# EAGLE board motor_driver_panel (EAGLE 6.6.0)
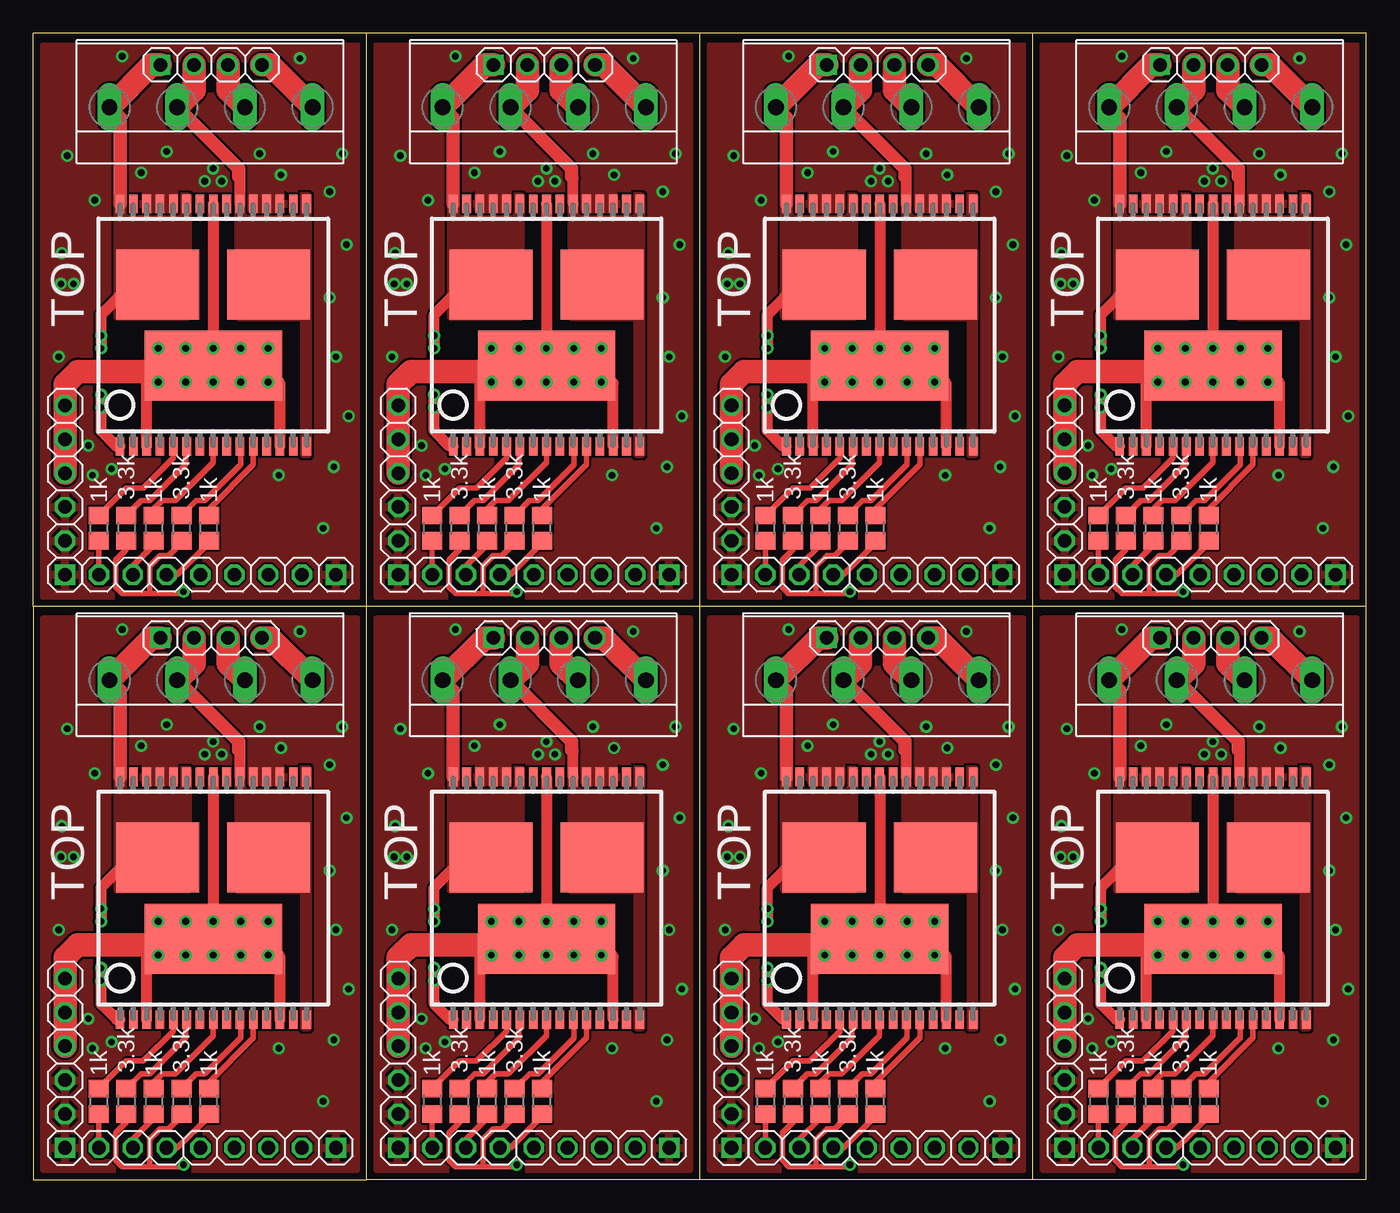
[diagram p0: board, top side]
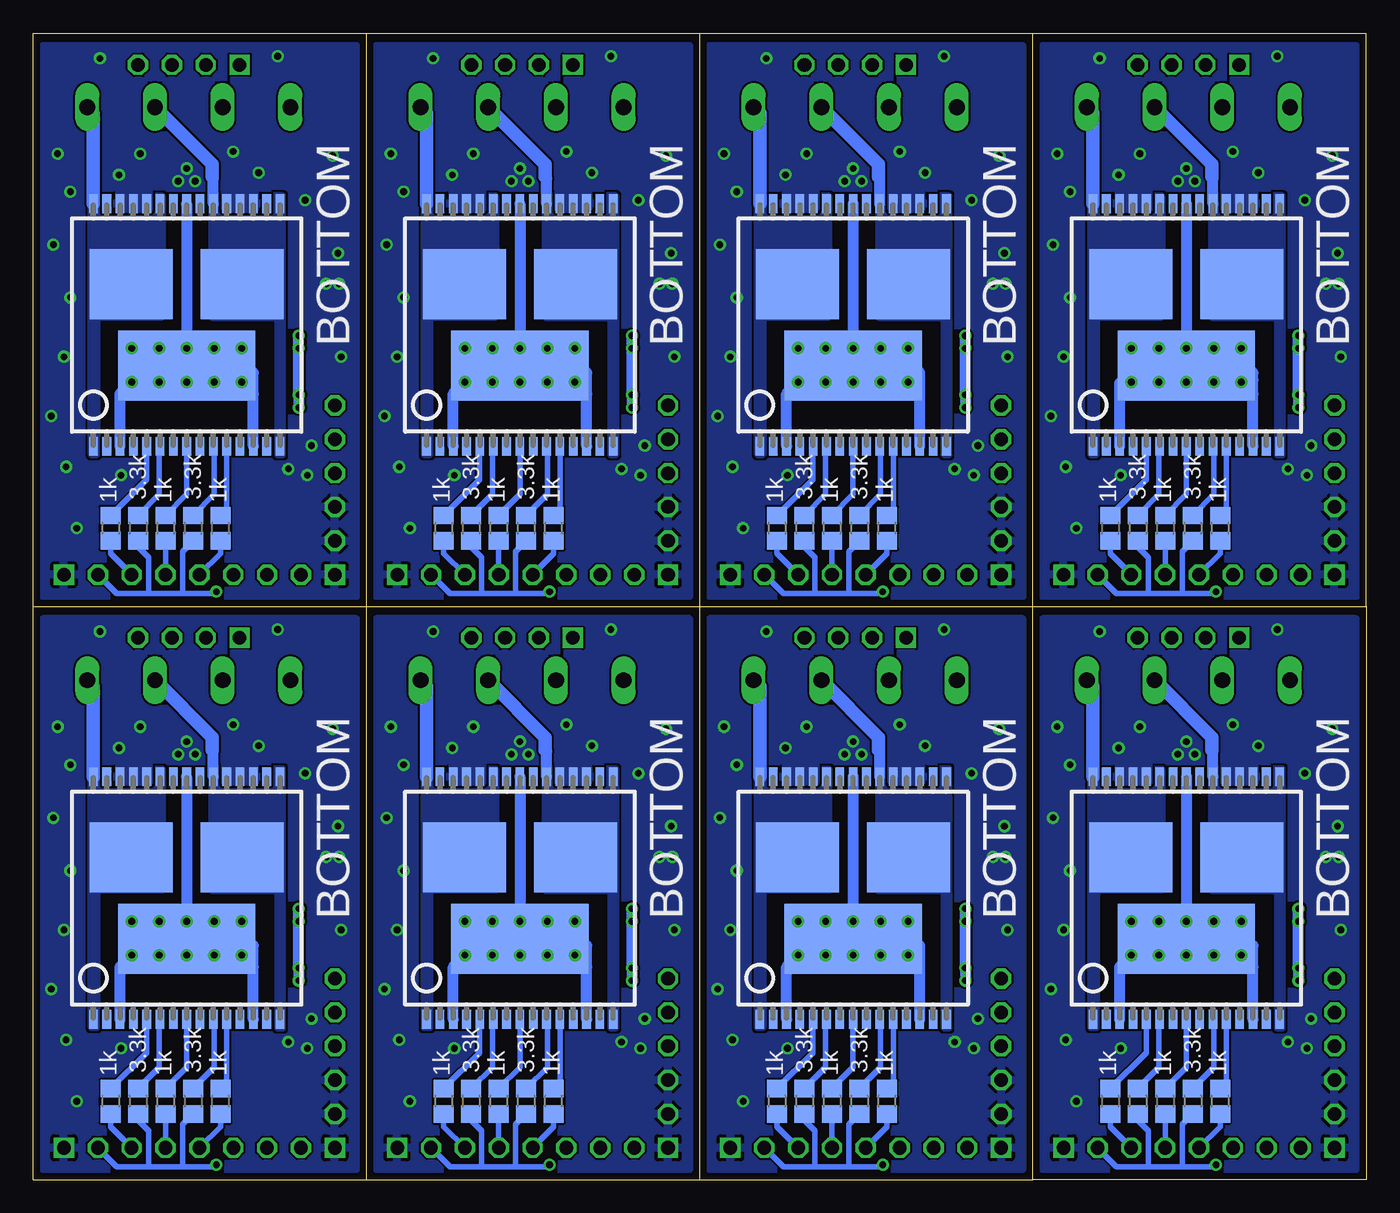
[diagram p1: board, bottom side, seen from below]

Size 100 x 86 mm. Coordinates in mm from the lower left corner, seen from the top.
Outline: 0,43 0,86 25,86
Outline: 75,0 100,0 100,43
Outline: 75,0 50,0
Outline: 50,0 25,0
Outline: 25,0 0,0 0,43
Outline: 25,0 25,43
Outline: 25,43 0,43
Outline: 50,0 50,43
Outline: 50,43 25,43
Outline: 75,0 75,43
Outline: 75,43 50,43
Outline: 100,43 75,43
Outline: 25,43 25,86
Outline: 50,43 50,86
Outline: 50,86 25,86
Outline: 75,43 75,86
Outline: 75,86 50,86
Outline: 100,43 100,86 75,86
Copper layers (1*16): Top 0.035mm / dielectric 1.5mm / Bottom 0.035mm
Design rules "default *": minimum track width 10mil, minimum drill 18mil, track to track 6mil, track to pad 6mil, pad to pad 6mil, via to via 6mil, smd to smd 0mil, copper to edge 20mil, drill to drill 8mil, minimum pad ring 10mil, minimum via ring 8mil, stop-mask expansion 4mil, vias tented up to drill 0mil, thermal gap 10mil
Net classes: 0 default: width 0.254 mm, drill 0.5 mm; 1 5v: width 0.254 mm, drill 0.5 mm; 2 power: width 0.406 mm, drill 0.5 mm, clearance 0.1 mm

## Footprints (pad centres in the part's own frame; a part is rotated, then mirrored left to right if it is on the bottom)
MP-SO-30 = smd 0.65 x 1.4: NC1 -6,9.1; NC2 -1,9.1; NC3 1,9.1; NC4 6,9.1; NC5 -6,-9.1; NC6 -4,-9.1; NC7 -1,-9.1; NC8 4,-9.1; NC9 6,-9.1; P1 -7,-9.1; P3 -5,-9.1; P5 -3,-9.1; P6 -2,-9.1; P8 0,-9.1; P9 1,-9.1; P10 2,-9.1; P11 3,-9.1; P13 5,-9.1; P15 7,-9.1; P16 7,9.1; P18 5,9.1; P19 4,9.1; P20 3,9.1; P21 2,9.1; P23 0,9.1; P25 -2,9.1; P26 -3,9.1; P27 -4,9.1; P28 -5,9.1; P30 -7,9.1 | smd 10.3 x 5.25: S1 0,-3.05 | smd 6.23 x 5.25: S2 -4.165,3.05; S3 4.165,3.05
1X08-S = drill 1.016 square: 1 -8.89,0 | drill 1.016 octagon: 2 -6.35,0; 3 -3.81,0; 4 -1.27,0; 5 1.27,0; 6 3.81,0; 7 6.35,0; 8 8.89,0
1X06-S = drill 1.016 square: 1 -6.35,0 | drill 1.016 octagon: 2 -3.81,0; 3 -1.27,0; 4 1.27,0; 5 3.81,0; 6 6.35,0
1X04-S = drill 1.016 square: 1 -3.81,0 | drill 1.016 octagon: 2 -1.27,0; 3 1.27,0; 4 3.81,0
R0805 = smd 1.3 x 1.5: 1 -0.95,0; 2 0.95,0
KLEMME_4-PIN = drill 1.194 long: 1 -2.54,0; 2 2.54,0; 3 7.62,0; 4 12.7,0

## Placement (x,y rotation side)
IC1  VNH2SP30-E  [MP-SO-30]  13.5,21.11 0 top
IC2  VNH2SP30-E  [MP-SO-30]  13.49,21.11 0 bottom
IC3  VNH2SP30-E  [MP-SO-30]  38.5,21.11 0 top
IC4  VNH2SP30-E  [MP-SO-30]  38.49,21.11 0 bottom
IC5  VNH2SP30-E  [MP-SO-30]  63.5,21.11 0 top
IC6  VNH2SP30-E  [MP-SO-30]  63.49,21.11 0 bottom
IC7  VNH2SP30-E  [MP-SO-30]  88.5,21.11 0 top
IC8  VNH2SP30-E  [MP-SO-30]  88.49,21.11 0 bottom
IC9  VNH2SP30-E  [MP-SO-30]  13.5,64.11 0 top
IC10  VNH2SP30-E  [MP-SO-30]  13.49,64.11 0 bottom
IC11  VNH2SP30-E  [MP-SO-30]  38.5,64.11 0 top
IC12  VNH2SP30-E  [MP-SO-30]  38.49,64.11 0 bottom
IC13  VNH2SP30-E  [MP-SO-30]  63.5,64.11 0 top
IC14  VNH2SP30-E  [MP-SO-30]  63.49,64.11 0 bottom
IC15  VNH2SP30-E  [MP-SO-30]  88.5,64.11 0 top
IC16  VNH2SP30-E  [MP-SO-30]  88.49,64.11 0 bottom
JP1  [1X08-S]  13.81,2.38 180 top
JP2  [1X06-S]  2.38,8.73 90 top
JP3  [1X04-S]  13.34,40.64 0 top
JP4  [1X08-S]  38.81,2.38 180 top
JP5  [1X06-S]  27.38,8.73 90 top
JP6  [1X04-S]  38.34,40.64 0 top
JP7  [1X08-S]  63.81,2.38 180 top
JP8  [1X06-S]  52.38,8.73 90 top
JP9  [1X04-S]  63.34,40.64 0 top
JP10  [1X08-S]  88.81,2.38 180 top
JP11  [1X06-S]  77.38,8.73 90 top
JP12  [1X04-S]  88.33,40.64 0 top
JP13  [1X08-S]  13.81,45.38 180 top
JP14  [1X06-S]  2.38,51.73 90 top
JP15  [1X04-S]  13.34,83.64 0 top
JP16  [1X08-S]  38.81,45.38 180 top
JP17  [1X06-S]  27.38,51.73 90 top
JP18  [1X04-S]  38.34,83.64 0 top
JP19  [1X08-S]  63.81,45.38 180 top
JP20  [1X06-S]  52.38,51.73 90 top
JP21  [1X04-S]  63.34,83.64 0 top
JP22  [1X08-S]  88.81,45.38 180 top
JP23  [1X06-S]  77.38,51.73 90 top
JP24  [1X04-S]  88.33,83.64 0 top
R1  3.3k  [R0805]  36.11,5.87 270 top
R2  3.3k  [R0805]  31.98,5.87 270 top
R3  3.3k  [R0805]  13.02,5.87 270 bottom
R4  3.3k  [R0805]  11.11,5.87 270 top
R5  3.3k  [R0805]  17.14,5.87 270 bottom
R6  1k  [R0805]  19.21,5.87 270 bottom
R7  1k  [R0805]  15.08,5.87 270 bottom
R8  1k  [R0805]  10.95,5.87 90 bottom
R9  1k  [R0805]  29.92,5.87 270 top
R10  3.3k  [R0805]  6.99,5.87 270 top
R11  1k  [R0805]  4.92,5.87 270 top
R12  1k  [R0805]  9.05,5.87 270 top
R13  1k  [R0805]  13.18,5.87 90 top
R14  1k  [R0805]  34.05,5.87 270 top
R15  1k  [R0805]  38.18,5.87 90 top
R16  3.3k  [R0805]  38.02,5.87 270 bottom
R17  3.3k  [R0805]  42.15,5.87 270 bottom
R18  1k  [R0805]  44.21,5.87 270 bottom
R19  1k  [R0805]  40.08,5.87 270 bottom
R20  1k  [R0805]  35.95,5.87 90 bottom
R21  3.3k  [R0805]  61.11,5.87 270 top
R22  3.3k  [R0805]  56.98,5.87 270 top
R23  1k  [R0805]  54.92,5.87 270 top
R24  1k  [R0805]  59.05,5.87 270 top
R25  1k  [R0805]  63.18,5.87 90 top
R26  3.3k  [R0805]  63.02,5.87 270 bottom
R27  3.3k  [R0805]  67.14,5.87 270 bottom
R28  1k  [R0805]  69.21,5.87 270 bottom
R29  1k  [R0805]  65.08,5.87 270 bottom
R30  1k  [R0805]  60.95,5.87 90 bottom
R31  3.3k  [R0805]  86.11,5.87 270 top
R32  3.3k  [R0805]  81.98,5.87 270 top
R33  1k  [R0805]  79.92,5.87 270 top
R34  1k  [R0805]  84.05,5.87 270 top
R35  1k  [R0805]  88.18,5.87 90 top
R36  3.3k  [R0805]  88.02,5.87 270 bottom
R37  3.3k  [R0805]  92.14,5.87 270 bottom
R38  1k  [R0805]  94.21,5.87 270 bottom
R39  1k  [R0805]  90.08,5.87 270 bottom
R40  1k  [R0805]  85.95,5.87 90 bottom
R41  3.3k  [R0805]  11.11,48.87 270 top
R42  3.3k  [R0805]  6.99,48.87 270 top
R43  1k  [R0805]  4.92,48.87 270 top
R44  1k  [R0805]  9.05,48.87 270 top
R45  1k  [R0805]  13.18,48.87 90 top
R46  3.3k  [R0805]  13.02,48.87 270 bottom
R47  3.3k  [R0805]  17.14,48.87 270 bottom
R48  1k  [R0805]  19.21,48.87 270 bottom
R49  1k  [R0805]  15.08,48.87 270 bottom
R50  1k  [R0805]  10.95,48.87 90 bottom
R51  3.3k  [R0805]  36.11,48.87 270 top
R52  3.3k  [R0805]  31.98,48.87 270 top
R53  1k  [R0805]  29.92,48.87 270 top
R54  1k  [R0805]  34.05,48.87 270 top
R55  1k  [R0805]  38.18,48.87 90 top
R56  3.3k  [R0805]  38.02,48.87 270 bottom
R57  3.3k  [R0805]  42.15,48.87 270 bottom
R58  1k  [R0805]  44.21,48.87 270 bottom
R59  1k  [R0805]  40.08,48.87 270 bottom
R60  1k  [R0805]  35.95,48.87 90 bottom
R61  3.3k  [R0805]  61.11,48.87 270 top
R62  3.3k  [R0805]  56.98,48.87 270 top
R63  1k  [R0805]  54.92,48.87 270 top
R64  1k  [R0805]  59.05,48.87 270 top
R65  1k  [R0805]  63.18,48.87 90 top
R66  3.3k  [R0805]  63.02,48.87 270 bottom
R67  3.3k  [R0805]  67.14,48.87 270 bottom
R68  1k  [R0805]  69.21,48.87 270 bottom
R69  1k  [R0805]  65.08,48.87 270 bottom
R70  1k  [R0805]  60.95,48.87 90 bottom
R71  3.3k  [R0805]  86.11,48.87 270 top
R72  3.3k  [R0805]  81.98,48.87 270 top
R73  1k  [R0805]  79.92,48.87 270 top
R74  1k  [R0805]  84.05,48.87 270 top
R75  1k  [R0805]  88.18,48.87 90 top
R76  3.3k  [R0805]  88.02,48.87 270 bottom
R77  3.3k  [R0805]  92.14,48.87 270 bottom
R78  1k  [R0805]  94.21,48.87 270 bottom
R79  1k  [R0805]  90.08,48.87 270 bottom
R80  1k  [R0805]  85.95,48.87 90 bottom
X1  [KLEMME_4-PIN]  8.26,37.47 0 top
X2  [KLEMME_4-PIN]  33.26,37.47 0 top
X3  [KLEMME_4-PIN]  58.26,37.47 0 top
X4  [KLEMME_4-PIN]  83.25,37.47 0 top
X5  [KLEMME_4-PIN]  8.26,80.47 0 top
X6  [KLEMME_4-PIN]  33.26,80.47 0 top
X7  [KLEMME_4-PIN]  58.26,80.47 0 top
X8  [KLEMME_4-PIN]  83.25,80.47 0 top

## Library data of the parts
IC1-IC16 = motor-driver
JP1-JP24 = pinhead-2
R1-R80 = rcl
X1-X8 = Schraubklemme

## Nets
+5V [5v]: JP1.2 R3.2 R4.2 R5.2 R10.2
+5V1 [5v]: JP4.2 R1.2 R2.2 R16.2 R17.2
+5V2 [5v]: JP7.2 R21.2 R22.2 R26.2 R27.2
+5V3 [5v]: JP10.2 R31.2 R32.2 R36.2 R37.2
+5V4 [5v]: JP13.2 R41.2 R42.2 R46.2 R47.2
+5V5 [5v]: JP16.2 R51.2 R52.2 R56.2 R57.2
+5V6 [5v]: JP19.2 R61.2 R62.2 R66.2 R67.2
+5V7 [5v]: JP22.2 R71.2 R72.2 R76.2 R77.2
+12V: IC1.P3 IC1.P13 IC1.P23 IC1.S1 IC2.P3 IC2.P13 IC2.P23 IC2.S1 JP2.4 JP2.5 JP2.6
+12V1: IC3.P3 IC3.P13 IC3.P23 IC3.S1 IC4.P3 IC4.P13 IC4.P23 IC4.S1 JP5.4 JP5.5 JP5.6
+12V2: IC5.P3 IC5.P13 IC5.P23 IC5.S1 IC6.P3 IC6.P13 IC6.P23 IC6.S1 JP8.4 JP8.5 JP8.6
+12V3: IC7.P3 IC7.P13 IC7.P23 IC7.S1 IC8.P3 IC8.P13 IC8.P23 IC8.S1 JP11.4 JP11.5 JP11.6
+12V4: IC9.P3 IC9.P13 IC9.P23 IC9.S1 IC10.P3 IC10.P13 IC10.P23 IC10.S1 JP14.4 JP14.5 JP14.6
+12V5: IC11.P3 IC11.P13 IC11.P23 IC11.S1 IC12.P3 IC12.P13 IC12.P23 IC12.S1 JP17.4 JP17.5 JP17.6
+12V6: IC13.P3 IC13.P13 IC13.P23 IC13.S1 IC14.P3 IC14.P13 IC14.P23 IC14.S1 JP20.4 JP20.5 JP20.6
+12V7: IC15.P3 IC15.P13 IC15.P23 IC15.S1 IC16.P3 IC16.P13 IC16.P23 IC16.S1 JP23.4 JP23.5 JP23.6
GND [5v]: IC1.P18 IC1.P19 IC1.P20 IC1.P26 IC1.P27 IC1.P28 IC2.P18 IC2.P19 IC2.P20 IC2.P26 IC2.P27 IC2.P28 JP1.1 JP2.1 JP2.2 JP2.3
GND1 [5v]: IC3.P18 IC3.P19 IC3.P20 IC3.P26 IC3.P27 IC3.P28 IC4.P18 IC4.P19 IC4.P20 IC4.P26 IC4.P27 IC4.P28 JP4.1 JP5.1 JP5.2 JP5.3
GND2 [5v]: IC5.P18 IC5.P19 IC5.P20 IC5.P26 IC5.P27 IC5.P28 IC6.P18 IC6.P19 IC6.P20 IC6.P26 IC6.P27 IC6.P28 JP7.1 JP8.1 JP8.2 JP8.3
GND3 [5v]: IC7.P18 IC7.P19 IC7.P20 IC7.P26 IC7.P27 IC7.P28 IC8.P18 IC8.P19 IC8.P20 IC8.P26 IC8.P27 IC8.P28 JP10.1 JP11.1 JP11.2 JP11.3
GND4 [5v]: IC9.P18 IC9.P19 IC9.P20 IC9.P26 IC9.P27 IC9.P28 IC10.P18 IC10.P19 IC10.P20 IC10.P26 IC10.P27 IC10.P28 JP13.1 JP14.1 JP14.2 JP14.3
GND5 [5v]: IC11.P18 IC11.P19 IC11.P20 IC11.P26 IC11.P27 IC11.P28 IC12.P18 IC12.P19 IC12.P20 IC12.P26 IC12.P27 IC12.P28 JP16.1 JP17.1 JP17.2 JP17.3
GND6 [5v]: IC13.P18 IC13.P19 IC13.P20 IC13.P26 IC13.P27 IC13.P28 IC14.P18 IC14.P19 IC14.P20 IC14.P26 IC14.P27 IC14.P28 JP19.1 JP20.1 JP20.2 JP20.3
GND7 [5v]: IC15.P18 IC15.P19 IC15.P20 IC15.P26 IC15.P27 IC15.P28 IC16.P18 IC16.P19 IC16.P20 IC16.P26 IC16.P27 IC16.P28 JP22.1 JP23.1 JP23.2 JP23.3
M1_FW: JP1.8 R11.2
M1_FW1: JP4.8 R9.2
M1_FW2: JP7.8 R23.2
M1_FW3: JP10.8 R33.2
M1_FW4: JP13.8 R43.2
M1_FW5: JP16.8 R53.2
M1_FW6: JP19.8 R63.2
M1_FW7: JP22.8 R73.2
M1_PWM: JP1.7 R12.2
M1_PWM1: JP4.7 R14.2
M1_PWM2: JP7.7 R24.2
M1_PWM3: JP10.7 R34.2
M1_PWM4: JP13.7 R44.2
M1_PWM5: JP16.7 R54.2
M1_PWM6: JP19.7 R64.2
M1_PWM7: JP22.7 R74.2
M1_RW: JP1.6 R13.1
M1_RW1: JP4.6 R15.1
M1_RW2: JP7.6 R25.1
M1_RW3: JP10.6 R35.1
M1_RW4: JP13.6 R45.1
M1_RW5: JP16.6 R55.1
M1_RW6: JP19.6 R65.1
M1_RW7: JP22.6 R75.1
M2_FW: JP1.3 R6.2
M2_FW1: JP4.3 R18.2
M2_FW2: JP7.3 R28.2
M2_FW3: JP10.3 R38.2
M2_FW4: JP13.3 R48.2
M2_FW5: JP16.3 R58.2
M2_FW6: JP19.3 R68.2
M2_FW7: JP22.3 R78.2
M2_PWM: JP1.4 R7.2
M2_PWM1: JP4.4 R19.2
M2_PWM2: JP7.4 R29.2
M2_PWM3: JP10.4 R39.2
M2_PWM4: JP13.4 R49.2
M2_PWM5: JP16.4 R59.2
M2_PWM6: JP19.4 R69.2
M2_PWM7: JP22.4 R79.2
M2_RW: JP1.5 R8.1
M2_RW1: JP4.5 R20.1
M2_RW2: JP7.5 R30.1
M2_RW3: JP10.5 R40.1
M2_RW4: JP13.5 R50.1
M2_RW5: JP16.5 R60.1
M2_RW6: JP19.5 R70.1
M2_RW7: JP22.5 R80.1
N$1: IC2.P5 R6.1
N$2: IC2.P6 R5.1
N$3: IC1.P5 R11.1
N$4: IC2.P10 R3.1
N$5: IC3.P5 R9.1
N$6: IC2.P8 R7.1
N$7: IC1.P6 R10.1
N$8: IC1.P10 R4.1
N$9: IC3.P6 R2.1
N$10: IC1.P8 R12.1
N$11: IC1.P11 R13.2
N$12 [power]: IC1.P1 IC1.P25 IC1.P30 IC1.S2 JP3.1 X1.1
N$13 [power]: IC1.P15 IC1.P16 IC1.P21 IC1.S3 JP3.2 X1.2
N$14: IC2.P11 R8.2
N$15: IC3.P10 R1.1
N$16: IC3.P8 R14.1
N$17: IC2.P15 IC2.P16 IC2.P21 IC2.S3 JP3.3 X1.3
N$18: IC3.P11 R15.2
N$19: IC2.P1 IC2.P25 IC2.P30 IC2.S2 JP3.4 X1.4
N$20 [power]: IC3.P1 IC3.P25 IC3.P30 IC3.S2 JP6.1 X2.1
N$21 [power]: IC3.P15 IC3.P16 IC3.P21 IC3.S3 JP6.2 X2.2
N$22: IC4.P5 R18.1
N$23: IC4.P6 R17.1
N$24: IC4.P10 R16.1
N$25: IC4.P8 R19.1
N$26: IC4.P11 R20.2
N$27: IC4.P15 IC4.P16 IC4.P21 IC4.S3 JP6.3 X2.3
N$28: IC4.P1 IC4.P25 IC4.P30 IC4.S2 JP6.4 X2.4
N$29: IC5.P5 R23.1
N$30: IC5.P6 R22.1
N$31: IC5.P10 R21.1
N$32: IC5.P8 R24.1
N$33: IC5.P11 R25.2
N$34 [power]: IC5.P1 IC5.P25 IC5.P30 IC5.S2 JP9.1 X3.1
N$35 [power]: IC5.P15 IC5.P16 IC5.P21 IC5.S3 JP9.2 X3.2
N$36: IC6.P5 R28.1
N$37: IC6.P6 R27.1
N$38: IC6.P10 R26.1
N$39: IC6.P8 R29.1
N$40: IC6.P11 R30.2
N$41: IC6.P15 IC6.P16 IC6.P21 IC6.S3 JP9.3 X3.3
N$42: IC6.P1 IC6.P25 IC6.P30 IC6.S2 JP9.4 X3.4
N$43: IC7.P5 R33.1
N$44: IC7.P6 R32.1
N$45: IC7.P10 R31.1
N$46: IC7.P8 R34.1
N$47: IC7.P11 R35.2
N$48 [power]: IC7.P1 IC7.P25 IC7.P30 IC7.S2 JP12.1 X4.1
N$49 [power]: IC7.P15 IC7.P16 IC7.P21 IC7.S3 JP12.2 X4.2
N$50: IC8.P5 R38.1
N$51: IC8.P6 R37.1
N$52: IC8.P10 R36.1
N$53: IC8.P8 R39.1
N$54: IC8.P11 R40.2
N$55: IC8.P15 IC8.P16 IC8.P21 IC8.S3 JP12.3 X4.3
N$56: IC8.P1 IC8.P25 IC8.P30 IC8.S2 JP12.4 X4.4
N$57: IC9.P5 R43.1
N$58: IC9.P6 R42.1
N$59: IC9.P10 R41.1
N$60: IC9.P8 R44.1
N$61: IC9.P11 R45.2
N$62 [power]: IC9.P1 IC9.P25 IC9.P30 IC9.S2 JP15.1 X5.1
N$63 [power]: IC9.P15 IC9.P16 IC9.P21 IC9.S3 JP15.2 X5.2
N$64: IC10.P5 R48.1
N$65: IC10.P6 R47.1
N$66: IC10.P10 R46.1
N$67: IC10.P8 R49.1
N$68: IC10.P11 R50.2
N$69: IC10.P15 IC10.P16 IC10.P21 IC10.S3 JP15.3 X5.3
N$70: IC10.P1 IC10.P25 IC10.P30 IC10.S2 JP15.4 X5.4
N$71: IC11.P5 R53.1
N$72: IC11.P6 R52.1
N$73: IC11.P10 R51.1
N$74: IC11.P8 R54.1
N$75: IC11.P11 R55.2
N$76 [power]: IC11.P1 IC11.P25 IC11.P30 IC11.S2 JP18.1 X6.1
N$77 [power]: IC11.P15 IC11.P16 IC11.P21 IC11.S3 JP18.2 X6.2
N$78: IC12.P5 R58.1
N$79: IC12.P6 R57.1
N$80: IC12.P10 R56.1
N$81: IC12.P8 R59.1
N$82: IC12.P11 R60.2
N$83: IC12.P15 IC12.P16 IC12.P21 IC12.S3 JP18.3 X6.3
N$84: IC12.P1 IC12.P25 IC12.P30 IC12.S2 JP18.4 X6.4
N$85: IC13.P5 R63.1
N$86: IC13.P6 R62.1
N$87: IC13.P10 R61.1
N$88: IC13.P8 R64.1
N$89: IC13.P11 R65.2
N$90 [power]: IC13.P1 IC13.P25 IC13.P30 IC13.S2 JP21.1 X7.1
N$91 [power]: IC13.P15 IC13.P16 IC13.P21 IC13.S3 JP21.2 X7.2
N$92: IC14.P5 R68.1
N$93: IC14.P6 R67.1
N$94: IC14.P10 R66.1
N$95: IC14.P8 R69.1
N$96: IC14.P11 R70.2
N$97: IC14.P15 IC14.P16 IC14.P21 IC14.S3 JP21.3 X7.3
N$98: IC14.P1 IC14.P25 IC14.P30 IC14.S2 JP21.4 X7.4
N$99: IC15.P5 R73.1
N$100: IC15.P6 R72.1
N$101: IC15.P10 R71.1
N$102: IC15.P8 R74.1
N$103: IC15.P11 R75.2
N$104 [power]: IC15.P1 IC15.P25 IC15.P30 IC15.S2 JP24.1 X8.1
N$105 [power]: IC15.P15 IC15.P16 IC15.P21 IC15.S3 JP24.2 X8.2
N$106: IC16.P5 R78.1
N$107: IC16.P6 R77.1
N$108: IC16.P10 R76.1
N$109: IC16.P8 R79.1
N$110: IC16.P11 R80.2
N$111: IC16.P15 IC16.P16 IC16.P21 IC16.S3 JP24.3 X8.3
N$112: IC16.P1 IC16.P25 IC16.P30 IC16.S2 JP24.4 X8.4

## Tracks (layer width: path | path; a pad name or v marks a point on that pad's centre or on a via)
+5V  (via drill 0.5)
  Top 0.406: R10.2 6.99,4.29 6.19,3.49 6.19,1.43 6.67,0.95 8.73,0.95 | 8.73,0.95 11.11,0.95 v11.27,1.11 | R4.2 10.8,4.92 10.8,4.61 10.79,4.6 10.79,4.45 10.16,3.81 9.53,3.81 8.73,3.02 8.73,0.95
  Bottom 0.406: JP1.2 18.73,0.95 16.35,0.95 | 16.35,0.95 13.81,0.95 | 13.81,0.95 13.81,4.13 R3.2 | R5.2 17.14,4.45 16.35,3.65 16.35,0.95 | v11.27,1.11 11.43,0.95 13.81,0.95
+5V1  (via drill 0.5)
  Top 0.406: R2.2 31.98,4.29 31.19,3.49 31.19,1.43 31.67,0.95 33.73,0.95 | 33.73,0.95 36.11,0.95 v36.27,1.11 | R1.2 35.8,4.92 35.8,4.61 35.8,4.6 35.8,4.45 35.16,3.81 34.52,3.81 33.73,3.02 33.73,0.95
  Bottom 0.406: JP4.2 43.73,0.95 41.35,0.95 | 41.35,0.95 38.81,0.95 | 38.81,0.95 38.81,4.13 R16.2 | R17.2 42.15,4.45 41.35,3.65 41.35,0.95 | v36.27,1.11 36.43,0.95 38.81,0.95
+5V2  (via drill 0.5)
  Top 0.406: R22.2 56.98,4.29 56.19,3.49 56.19,1.43 56.67,0.95 58.73,0.95 | 58.73,0.95 61.11,0.95 v61.27,1.11 | R21.2 60.8,4.92 60.8,4.61 60.8,4.6 60.8,4.45 60.16,3.81 59.52,3.81 58.73,3.02 58.73,0.95
  Bottom 0.406: JP7.2 68.73,0.95 66.35,0.95 | 66.35,0.95 63.81,0.95 | 63.81,0.95 63.81,4.13 R26.2 | R27.2 67.14,4.45 66.35,3.65 66.35,0.95 | v61.27,1.11 61.43,0.95 63.81,0.95
+5V3  (via drill 0.5)
  Top 0.406: R32.2 81.98,4.29 81.19,3.49 81.19,1.43 81.67,0.95 83.73,0.95 | 83.73,0.95 86.11,0.95 v86.27,1.11 | R31.2 85.8,4.92 85.8,4.61 85.8,4.6 85.8,4.45 85.16,3.81 84.53,3.81 83.73,3.02 83.73,0.95
  Bottom 0.406: JP10.2 93.73,0.95 91.35,0.95 | 91.35,0.95 88.81,0.95 | 88.81,0.95 88.81,4.13 R36.2 | R37.2 92.14,4.45 91.35,3.65 91.35,0.95 | v86.27,1.11 86.43,0.95 88.81,0.95
+5V4  (via drill 0.5)
  Top 0.406: R42.2 6.99,47.29 6.19,46.49 6.19,44.43 6.67,43.95 8.73,43.95 | 8.73,43.95 11.11,43.95 v11.27,44.11 | R41.2 10.8,47.92 10.8,47.61 10.79,47.6 10.79,47.45 10.16,46.81 9.53,46.81 8.73,46.02 8.73,43.95
  Bottom 0.406: JP13.2 18.73,43.95 16.35,43.95 | 16.35,43.95 13.81,43.95 | 13.81,43.95 13.81,47.13 R46.2 | R47.2 17.14,47.45 16.35,46.65 16.35,43.95 | v11.27,44.11 11.43,43.95 13.81,43.95
+5V5  (via drill 0.5)
  Top 0.406: R52.2 31.98,47.29 31.19,46.49 31.19,44.43 31.67,43.95 33.73,43.95 | 33.73,43.95 36.11,43.95 v36.27,44.11 | R51.2 35.8,47.92 35.8,47.61 35.8,47.6 35.8,47.45 35.16,46.81 34.52,46.81 33.73,46.02 33.73,43.95
  Bottom 0.406: JP16.2 43.73,43.95 41.35,43.95 | 41.35,43.95 38.81,43.95 | 38.81,43.95 38.81,47.13 R56.2 | R57.2 42.15,47.45 41.35,46.65 41.35,43.95 | v36.27,44.11 36.43,43.95 38.81,43.95
+5V6  (via drill 0.5)
  Top 0.406: R62.2 56.98,47.29 56.19,46.49 56.19,44.43 56.67,43.95 58.73,43.95 | 58.73,43.95 61.11,43.95 v61.27,44.11 | R61.2 60.8,47.92 60.8,47.61 60.8,47.6 60.8,47.45 60.16,46.81 59.52,46.81 58.73,46.02 58.73,43.95
  Bottom 0.406: JP19.2 68.73,43.95 66.35,43.95 | 66.35,43.95 63.81,43.95 | 63.81,43.95 63.81,47.13 R66.2 | R67.2 67.14,47.45 66.35,46.65 66.35,43.95 | v61.27,44.11 61.43,43.95 63.81,43.95
+5V7  (via drill 0.5)
  Top 0.406: R72.2 81.98,47.29 81.19,46.49 81.19,44.43 81.67,43.95 83.73,43.95 | 83.73,43.95 86.11,43.95 v86.27,44.11 | R71.2 85.8,47.92 85.8,47.61 85.8,47.6 85.8,47.45 85.16,46.81 84.53,46.81 83.73,46.02 83.73,43.95
  Bottom 0.406: JP22.2 93.73,43.95 91.35,43.95 | 91.35,43.95 88.81,43.95 | 88.81,43.95 88.81,47.13 R76.2 | R77.2 92.14,47.45 91.35,46.65 91.35,43.95 | v86.27,44.11 86.43,43.95 88.81,43.95
+12V  (via drill 0.5)
  Top 0.406: IC1.S1 12.19,19.37 v11.43,19.37 | IC2.S1 IC1.S1 | IC1.S1 14.73,16.83 v15.56,16.83 15.4,17.3 15.88,17.78 16.67,18.57 v17.62,19.37 | 12.86,19.05 12.38,18.57 | v9.37,19.37 9.84,18.57 10.08,18.34 10.32,18.1 9.84,17.62 v9.37,16.83 | 13.5,19.21 13.49,19.21 v13.49,19.37 v13.5,19.36 13.5,19.05 | 12.86,19.05 12.38,19.05 | 12.38,19.05 11.43,18.1 | 12.38,19.05 12.06,19.05 v11.43,19.37 | IC1.S1 13.5,19.04 13.49,19.05 | 13.49,19.05 12.86,19.05 | v11.43,19.37 13.18,19.37 13.49,19.05
  Top 0.813: IC1.P3 8.5,18.01 8.57,18.1 10.32,18.1 11.43,18.1 11.59,18.1 | 11.59,18.1 13.46,18.1 IC1.S1 | IC1.P23 13.5,19.21 | 13.5,19.05 IC1.S1 | IC1.P13 18.5,16.74 17.54,17.7 | 17.54,17.7 16.67,18.57 | v11.43,16.83 11.59,18.1 | v13.49,16.83 IC2.S1 IC1.S1 | v15.56,19.37 15.56,18.1 15.88,17.78 | v17.62,16.83 17.46,17.62 17.54,17.7
  Top 1.778: JP2.4 JP2.5 | JP2.5 JP2.6 | JP2.5 2.38,16.67 3.33,17.62 9.37,17.62 10.08,18.34
  Bottom 0.406: IC2.S1 v13.49,19.37
  Bottom 0.813: IC2.P23 v13.49,19.37 13.49,19.05 | 10,19.05 8.49,17.54 IC2.P13 8.49,15.96 v9.37,16.83 | IC2.P3 18.49,15.96 v17.62,16.83
+12V1  (via drill 0.5)
  Top 0.406: IC3.S1 37.19,19.37 v36.43,19.37 | IC4.S1 IC3.S1 | IC3.S1 39.73,16.83 v40.56,16.83 40.4,17.3 40.88,17.78 41.67,18.57 v42.62,19.37 | 37.86,19.05 37.38,18.57 | v34.37,19.37 34.84,18.57 35.08,18.34 35.32,18.1 34.84,17.62 v34.37,16.83 | 38.5,19.21 38.49,19.21 v38.49,19.37 v38.5,19.36 38.5,19.05 | 37.86,19.05 37.38,19.05 | 37.38,19.05 36.43,18.1 | 37.38,19.05 37.06,19.05 v36.43,19.37 | IC3.S1 38.5,19.04 38.49,19.05 | 38.49,19.05 37.86,19.05 | v36.43,19.37 38.18,19.37 38.49,19.05
  Top 0.813: IC3.P3 33.5,18.01 33.57,18.1 35.32,18.1 36.43,18.1 36.59,18.1 | 36.59,18.1 38.46,18.1 IC3.S1 | IC3.P23 38.5,19.21 | 38.5,19.05 IC3.S1 | IC3.P13 43.5,16.74 42.54,17.7 | 42.54,17.7 41.67,18.57 | v36.43,16.83 36.59,18.1 | v38.49,16.83 IC4.S1 IC3.S1 | v40.56,19.37 40.56,18.1 40.88,17.78 | v42.62,16.83 42.46,17.62 42.54,17.7
  Top 1.778: JP5.4 JP5.5 | JP5.5 JP5.6 | JP5.5 27.38,16.67 28.33,17.62 34.37,17.62 35.08,18.34
  Bottom 0.406: IC4.S1 v38.49,19.37
  Bottom 0.813: IC4.P23 v38.49,19.37 38.49,19.05 | 35,19.05 33.49,17.54 IC4.P13 33.49,15.96 v34.37,16.83 | IC4.P3 43.49,15.96 v42.62,16.83
+12V2  (via drill 0.5)
  Top 0.406: IC5.S1 62.19,19.37 v61.43,19.37 | IC6.S1 IC5.S1 | IC5.S1 64.73,16.83 v65.56,16.83 65.4,17.3 65.88,17.78 66.67,18.57 v67.62,19.37 | 62.86,19.05 62.38,18.57 | v59.37,19.37 59.84,18.57 60.08,18.34 60.32,18.1 59.84,17.62 v59.37,16.83 | 63.5,19.21 63.49,19.21 v63.49,19.37 v63.5,19.36 63.5,19.05 | 62.86,19.05 62.38,19.05 | 62.38,19.05 61.43,18.1 | 62.38,19.05 62.06,19.05 v61.43,19.37 | IC5.S1 63.5,19.04 63.49,19.05 | 63.49,19.05 62.86,19.05 | v61.43,19.37 63.18,19.37 63.49,19.05
  Top 0.813: IC5.P3 58.5,18.01 58.57,18.1 60.32,18.1 61.43,18.1 61.59,18.1 | 61.59,18.1 63.46,18.1 IC5.S1 | IC5.P23 63.5,19.21 | 63.5,19.05 IC5.S1 | IC5.P13 68.5,16.74 67.54,17.7 | 67.54,17.7 66.67,18.57 | v61.43,16.83 61.59,18.1 | v63.49,16.83 IC6.S1 IC5.S1 | v65.56,19.37 65.56,18.1 65.88,17.78 | v67.62,16.83 67.46,17.62 67.54,17.7
  Top 1.778: JP8.4 JP8.5 | JP8.5 JP8.6 | JP8.5 52.38,16.67 53.33,17.62 59.37,17.62 60.08,18.34
  Bottom 0.406: IC6.S1 v63.49,19.37
  Bottom 0.813: IC6.P23 v63.49,19.37 63.49,19.05 | 60,19.05 58.49,17.54 IC6.P13 58.49,15.96 v59.37,16.83 | IC6.P3 68.49,15.96 v67.62,16.83
+12V3  (via drill 0.5)
  Top 0.406: IC7.S1 87.19,19.37 v86.43,19.37 | IC8.S1 IC7.S1 | IC7.S1 89.73,16.83 v90.56,16.83 90.4,17.3 90.88,17.78 91.67,18.57 v92.62,19.37 | 87.86,19.05 87.38,18.57 | v84.37,19.37 84.84,18.57 85.08,18.34 85.32,18.1 84.84,17.62 v84.37,16.83 | 88.5,19.21 88.49,19.21 v88.49,19.37 v88.5,19.36 88.5,19.05 | 87.86,19.05 87.38,19.05 | 87.38,19.05 86.43,18.1 | 87.38,19.05 87.06,19.05 v86.43,19.37 | IC7.S1 88.5,19.04 88.49,19.05 | 88.49,19.05 87.86,19.05 | v86.43,19.37 88.18,19.37 88.49,19.05
  Top 0.813: IC7.P3 83.5,18.01 83.57,18.1 85.32,18.1 86.43,18.1 86.59,18.1 | 86.59,18.1 88.46,18.1 IC7.S1 | IC7.P23 88.5,19.21 | 88.5,19.05 IC7.S1 | IC7.P13 93.5,16.74 92.54,17.7 | 92.54,17.7 91.67,18.57 | v86.43,16.83 86.59,18.1 | v88.49,16.83 IC8.S1 IC7.S1 | v90.56,19.37 90.56,18.1 90.88,17.78 | v92.62,16.83 92.46,17.62 92.54,17.7
  Top 1.778: JP11.4 JP11.5 | JP11.5 JP11.6 | JP11.5 77.38,16.67 78.33,17.62 84.37,17.62 85.08,18.34
  Bottom 0.406: IC8.S1 v88.49,19.37
  Bottom 0.813: IC8.P23 v88.49,19.37 88.49,19.05 | 85,19.05 83.49,17.54 IC8.P13 83.49,15.96 v84.37,16.83 | IC8.P3 93.49,15.96 v92.62,16.83
+12V4  (via drill 0.5)
  Top 0.406: IC9.S1 12.19,62.37 v11.43,62.37 | IC10.S1 IC9.S1 | IC9.S1 14.73,59.83 v15.56,59.83 15.4,60.3 15.88,60.78 16.67,61.57 v17.62,62.37 | 12.86,62.05 12.38,61.57 | v9.37,62.37 9.84,61.57 10.08,61.34 10.32,61.1 9.84,60.62 v9.37,59.83 | 13.5,62.21 13.49,62.22 v13.49,62.37 v13.5,62.36 13.5,62.05 | 12.86,62.05 12.38,62.05 | 12.38,62.05 11.43,61.1 | 12.38,62.05 12.06,62.05 v11.43,62.37 | IC9.S1 13.5,62.04 13.49,62.05 | 13.49,62.05 12.86,62.05 | v11.43,62.37 13.18,62.37 13.49,62.05
  Top 0.813: IC9.P3 8.5,61.01 8.57,61.1 10.32,61.1 11.43,61.1 11.59,61.1 | 11.59,61.1 13.46,61.1 IC9.S1 | IC9.P23 13.5,62.21 | 13.5,62.05 IC9.S1 | IC9.P13 18.5,59.74 17.54,60.7 | 17.54,60.7 16.67,61.57 | v11.43,59.83 11.59,61.1 | v13.49,59.83 IC10.S1 IC9.S1 | v15.56,62.37 15.56,61.1 15.88,60.78 | v17.62,59.83 17.46,60.62 17.54,60.7
  Top 1.778: JP14.4 JP14.5 | JP14.5 JP14.6 | JP14.5 2.38,59.67 3.33,60.62 9.37,60.62 10.08,61.34
  Bottom 0.406: IC10.S1 v13.49,62.37
  Bottom 0.813: IC10.P23 v13.49,62.37 13.49,62.05 | IC10.P13 8.49,60.54 10,62.05 | 17.12,61.12 18.49,59.75 IC10.P3 18.49,58.95 v17.62,59.83 | IC10.P13 8.49,59.99 8.5,60 | IC10.P13 8.49,58.95 v9.37,59.83
+12V5  (via drill 0.5)
  Top 0.406: IC11.S1 37.19,62.37 v36.43,62.37 | IC12.S1 IC11.S1 | IC11.S1 39.73,59.83 v40.56,59.83 40.4,60.3 40.88,60.78 41.67,61.57 v42.62,62.37 | 37.86,62.05 37.38,61.57 | v34.37,62.37 34.84,61.57 35.08,61.34 35.32,61.1 34.84,60.62 v34.37,59.83 | 38.5,62.21 38.49,62.22 v38.49,62.37 v38.5,62.36 38.5,62.05 | 37.86,62.05 37.38,62.05 | 37.38,62.05 36.43,61.1 | 37.38,62.05 37.06,62.05 v36.43,62.37 | IC11.S1 38.5,62.04 38.49,62.05 | 38.49,62.05 37.86,62.05 | v36.43,62.37 38.18,62.37 38.49,62.05
  Top 0.813: IC11.P3 33.5,61.01 33.57,61.1 35.32,61.1 36.43,61.1 36.59,61.1 | 36.59,61.1 38.46,61.1 IC11.S1 | IC11.P23 38.5,62.21 | 38.5,62.05 IC11.S1 | IC11.P13 43.5,59.74 42.54,60.7 | 42.54,60.7 41.67,61.57 | v36.43,59.83 36.59,61.1 | v38.49,59.83 IC12.S1 IC11.S1 | v40.56,62.37 40.56,61.1 40.88,60.78 | v42.62,59.83 42.46,60.62 42.54,60.7
  Top 1.778: JP17.4 JP17.5 | JP17.5 JP17.6 | JP17.5 27.38,59.67 28.33,60.62 34.37,60.62 35.08,61.34
  Bottom 0.406: IC12.S1 v38.49,62.37
  Bottom 0.813: IC12.P23 v38.49,62.37 38.49,62.05 | 35,62.05 33.49,60.54 IC12.P13 33.49,58.95 v34.37,59.83 | IC12.P3 43.49,58.95 v42.62,59.83
+12V6  (via drill 0.5)
  Top 0.406: IC13.S1 62.19,62.37 v61.43,62.37 | IC14.S1 IC13.S1 | IC13.S1 64.73,59.83 v65.56,59.83 65.4,60.3 65.88,60.78 66.67,61.57 v67.62,62.37 | 62.86,62.05 62.38,61.57 | v59.37,62.37 59.84,61.57 60.08,61.34 60.32,61.1 59.84,60.62 v59.37,59.83 | 63.5,62.21 63.49,62.22 v63.49,62.37 v63.5,62.36 63.5,62.05 | 62.86,62.05 62.38,62.05 | 62.38,62.05 61.43,61.1 | 62.38,62.05 62.06,62.05 v61.43,62.37 | IC13.S1 63.5,62.04 63.49,62.05 | 63.49,62.05 62.86,62.05 | v61.43,62.37 63.18,62.37 63.49,62.05
  Top 0.813: IC13.P3 58.5,61.01 58.57,61.1 60.32,61.1 61.43,61.1 61.59,61.1 | 61.59,61.1 63.46,61.1 IC13.S1 | IC13.P23 63.5,62.21 | 63.5,62.05 IC13.S1 | IC13.P13 68.5,59.74 67.54,60.7 | 67.54,60.7 66.67,61.57 | v61.43,59.83 61.59,61.1 | v63.49,59.83 IC14.S1 IC13.S1 | v65.56,62.37 65.56,61.1 65.88,60.78 | v67.62,59.83 67.46,60.62 67.54,60.7
  Top 1.778: JP20.4 JP20.5 | JP20.5 JP20.6 | JP20.5 52.38,59.67 53.33,60.62 59.37,60.62 60.08,61.34
  Bottom 0.406: IC14.S1 v63.49,62.37
  Bottom 0.813: IC14.P23 v63.49,62.37 63.49,62.05 | 60,62.05 58.49,60.54 IC14.P13 58.49,58.95 v59.37,59.83 | IC14.P3 68.49,58.95 v67.62,59.83
+12V7  (via drill 0.5)
  Top 0.406: IC15.S1 87.19,62.37 v86.43,62.37 | IC16.S1 IC15.S1 | IC15.S1 89.73,59.83 v90.56,59.83 90.4,60.3 90.88,60.78 91.67,61.57 v92.62,62.37 | 87.86,62.05 87.38,61.57 | v84.37,62.37 84.84,61.57 85.08,61.34 85.32,61.1 84.84,60.62 v84.37,59.83 | 88.5,62.21 88.49,62.22 v88.49,62.37 v88.5,62.36 88.5,62.05 | 87.86,62.05 87.38,62.05 | 87.38,62.05 86.43,61.1 | 87.38,62.05 87.06,62.05 v86.43,62.37 | IC15.S1 88.5,62.04 88.49,62.05 | 88.49,62.05 87.86,62.05 | v86.43,62.37 88.18,62.37 88.49,62.05
  Top 0.813: IC15.P3 83.5,61.01 83.57,61.1 85.32,61.1 86.43,61.1 86.59,61.1 | 86.59,61.1 88.46,61.1 IC15.S1 | IC15.P23 88.5,62.21 | 88.5,62.05 IC15.S1 | IC15.P13 93.5,59.74 92.54,60.7 | 92.54,60.7 91.67,61.57 | v86.43,59.83 86.59,61.1 | v88.49,59.83 IC16.S1 IC15.S1 | v90.56,62.37 90.56,61.1 90.88,60.78 | v92.62,59.83 92.46,60.62 92.54,60.7
  Top 1.778: JP23.4 JP23.5 | JP23.5 JP23.6 | JP23.5 77.38,59.67 78.33,60.62 84.37,60.62 85.08,61.34
  Bottom 0.406: IC16.S1 v88.49,62.37
  Bottom 0.813: IC16.P23 v88.49,62.37 88.49,62.05 | 85,62.05 83.49,60.54 IC16.P13 83.49,58.95 v84.37,59.83 | IC16.P3 93.49,58.95 v92.62,59.83
GND  (via drill 0.5)
  other vias: 4.13,12.06 5.87,10.32 4.45,9.84 18.41,9.84 21.75,5.87 22.54,10.48 23.65,14.29 22.7,18.73 22.23,23.18 23.5,27.15 22.23,31.11 23.18,33.97 18.57,32.38 16.99,33.97 8.1,32.54 10,34.13 2.54,33.81 4.6,30.48 2.14,26.51 2.06,24.21 1.91,18.73 12.86,31.91 14.13,31.91 13.49,32.86 6.67,41.27 20,41.12 3.02,24.21
  pour Bottom (rank 6): 0.77,42.05 24.27,42.05 24.27,0.77 0.77,0.77
  pour Top (no thermals): 16.33,29.82 18.55,29.82 18.55,33.95 16.33,33.95
  pour Top (no thermals): 8.39,29.82 10.61,29.82 10.61,33.47 8.39,33.47
  pour Top (rank 6): 0.77,42.05 24.27,42.05 24.27,0.77 0.77,0.77
  pour Bottom (no thermals): 8.39,29.82 10.61,29.82 10.61,33.79 8.39,33.79
  pour Bottom (no thermals): 16.33,29.82 18.55,29.82 18.55,33.47 16.33,33.47
GND1  (via drill 0.5)
  other vias: 29.13,12.06 30.87,10.32 29.45,9.84 43.41,9.84 46.75,5.87 47.54,10.48 48.65,14.29 47.7,18.73 47.23,23.18 48.49,27.15 47.23,31.11 48.18,33.97 43.57,32.38 41.99,33.97 33.1,32.54 35,34.13 27.54,33.81 29.6,30.48 27.14,26.51 27.06,24.21 26.91,18.73 37.86,31.91 39.13,31.91 38.49,32.86 31.67,41.27 45,41.12 28.02,24.21
  pour Bottom (rank 6): 25.77,42.05 49.27,42.05 49.27,0.77 25.77,0.77
  pour Top (no thermals): 41.33,29.82 43.55,29.82 43.55,33.95 41.33,33.95
  pour Top (no thermals): 33.39,29.82 35.61,29.82 35.61,33.47 33.39,33.47
  pour Top (rank 6): 25.77,42.05 49.27,42.05 49.27,0.77 25.77,0.77
  pour Bottom (no thermals): 33.39,29.82 35.61,29.82 35.61,33.79 33.39,33.79
  pour Bottom (no thermals): 41.33,29.82 43.55,29.82 43.55,33.47 41.33,33.47
GND2  (via drill 0.5)
  other vias: 54.13,12.06 55.87,10.32 54.45,9.84 68.42,9.84 71.75,5.87 72.54,10.48 73.65,14.29 72.7,18.73 72.22,23.18 73.5,27.15 72.22,31.11 73.18,33.97 68.57,32.38 66.99,33.97 58.1,32.54 60,34.13 52.54,33.81 54.6,30.48 52.14,26.51 52.06,24.21 51.91,18.73 62.86,31.91 64.13,31.91 63.49,32.86 56.67,41.27 70,41.12 53.02,24.21
  pour Bottom (rank 6): 50.77,42.05 74.27,42.05 74.27,0.77 50.77,0.77
  pour Top (no thermals): 66.33,29.82 68.55,29.82 68.55,33.95 66.33,33.95
  pour Top (no thermals): 58.39,29.82 60.61,29.82 60.61,33.47 58.39,33.47
  pour Top (rank 6): 50.77,42.05 74.27,42.05 74.27,0.77 50.77,0.77
  pour Bottom (no thermals): 58.39,29.82 60.61,29.82 60.61,33.79 58.39,33.79
  pour Bottom (no thermals): 66.33,29.82 68.55,29.82 68.55,33.47 66.33,33.47
GND3  (via drill 0.5)
  other vias: 79.13,12.06 80.87,10.32 79.44,9.84 93.42,9.84 96.75,5.87 97.54,10.48 98.65,14.29 97.7,18.73 97.22,23.18 98.5,27.15 97.22,31.11 98.18,33.97 93.57,32.38 91.99,33.97 83.1,32.54 85,34.13 77.54,33.81 79.6,30.48 77.14,26.51 77.06,24.21 76.91,18.73 87.86,31.91 89.13,31.91 88.49,32.86 81.67,41.27 95,41.12 78.02,24.21
  pour Bottom (rank 6): 75.77,42.05 99.27,42.05 99.27,0.77 75.77,0.77
  pour Top (no thermals): 91.33,29.82 93.55,29.82 93.55,33.95 91.33,33.95
  pour Top (no thermals): 83.39,29.82 85.61,29.82 85.61,33.47 83.39,33.47
  pour Top (rank 6): 75.77,42.05 99.27,42.05 99.27,0.77 75.77,0.77
  pour Bottom (no thermals): 83.39,29.82 85.61,29.82 85.61,33.79 83.39,33.79
  pour Bottom (no thermals): 91.33,29.82 93.55,29.82 93.55,33.47 91.33,33.47
GND4  (via drill 0.5)
  other vias: 4.13,55.06 5.87,53.32 4.45,52.84 18.41,52.84 21.75,48.87 22.54,53.48 23.65,57.29 22.7,61.73 22.23,66.18 23.5,70.15 22.23,74.11 23.18,76.97 18.57,75.39 16.99,76.97 8.1,75.54 10,77.13 2.54,76.81 4.6,73.48 2.14,69.51 2.06,67.21 1.91,61.73 12.86,74.91 14.13,74.91 13.49,75.86 6.67,84.28 20,84.12 3.02,67.21
  pour Bottom (rank 6): 0.77,85.05 24.27,85.05 24.27,43.77 0.77,43.77
  pour Top (no thermals): 16.33,72.82 18.55,72.82 18.55,76.95 16.33,76.95
  pour Top (no thermals): 8.39,72.82 10.61,72.82 10.61,76.47 8.39,76.47
  pour Top (rank 6): 0.77,85.05 24.27,85.05 24.27,43.77 0.77,43.77
  pour Bottom (no thermals): 8.39,72.82 10.61,72.82 10.61,76.79 8.39,76.79
  pour Bottom (no thermals): 16.33,72.82 18.55,72.82 18.55,76.47 16.33,76.47
GND5  (via drill 0.5)
  other vias: 29.13,55.06 30.87,53.32 29.45,52.84 43.41,52.84 46.75,48.87 47.54,53.48 48.65,57.29 47.7,61.73 47.23,66.18 48.49,70.15 47.23,74.11 48.18,76.97 43.57,75.39 41.99,76.97 33.1,75.54 35,77.13 27.54,76.81 29.6,73.48 27.14,69.51 27.06,67.21 26.91,61.73 37.86,74.91 39.13,74.91 38.49,75.86 31.67,84.28 45,84.12 28.02,67.21
  pour Bottom (rank 6): 25.77,85.05 49.27,85.05 49.27,43.77 25.77,43.77
  pour Top (no thermals): 41.33,72.82 43.55,72.82 43.55,76.95 41.33,76.95
  pour Top (no thermals): 33.39,72.82 35.61,72.82 35.61,76.47 33.39,76.47
  pour Top (rank 6): 25.77,85.05 49.27,85.05 49.27,43.77 25.77,43.77
  pour Bottom (no thermals): 33.39,72.82 35.61,72.82 35.61,76.79 33.39,76.79
  pour Bottom (no thermals): 41.33,72.82 43.55,72.82 43.55,76.47 41.33,76.47
GND6  (via drill 0.5)
  other vias: 54.13,55.06 55.87,53.32 54.45,52.84 68.42,52.84 71.75,48.87 72.54,53.48 73.65,57.29 72.7,61.73 72.22,66.18 73.5,70.15 72.22,74.11 73.18,76.97 68.57,75.39 66.99,76.97 58.1,75.54 60,77.13 52.54,76.81 54.6,73.48 52.14,69.51 52.06,67.21 51.91,61.73 62.86,74.91 64.13,74.91 63.49,75.86 56.67,84.28 70,84.12 53.02,67.21
  pour Bottom (rank 6): 50.77,85.05 74.27,85.05 74.27,43.77 50.77,43.77
  pour Top (no thermals): 66.33,72.82 68.55,72.82 68.55,76.95 66.33,76.95
  pour Top (no thermals): 58.39,72.82 60.61,72.82 60.61,76.47 58.39,76.47
  pour Top (rank 6): 50.77,85.05 74.27,85.05 74.27,43.77 50.77,43.77
  pour Bottom (no thermals): 58.39,72.82 60.61,72.82 60.61,76.79 58.39,76.79
  pour Bottom (no thermals): 66.33,72.82 68.55,72.82 68.55,76.47 66.33,76.47
GND7  (via drill 0.5)
  other vias: 79.13,55.06 80.87,53.32 79.44,52.84 93.42,52.84 96.75,48.87 97.54,53.48 98.65,57.29 97.7,61.73 97.22,66.18 98.5,70.15 97.22,74.11 98.18,76.97 93.57,75.39 91.99,76.97 83.1,75.54 85,77.13 77.54,76.81 79.6,73.48 77.14,69.51 77.06,67.21 76.91,61.73 87.86,74.91 89.13,74.91 88.49,75.86 81.67,84.28 95,84.12 78.02,67.21
  pour Bottom (rank 6): 75.77,85.05 99.27,85.05 99.27,43.77 75.77,43.77
  pour Top (no thermals): 91.33,72.82 93.55,72.82 93.55,76.95 91.33,76.95
  pour Top (no thermals): 83.39,72.82 85.61,72.82 85.61,76.47 83.39,76.47
  pour Top (rank 6): 75.77,85.05 99.27,85.05 99.27,43.77 75.77,43.77
  pour Bottom (no thermals): 83.39,72.82 85.61,72.82 85.61,76.79 83.39,76.79
  pour Bottom (no thermals): 91.33,72.82 93.55,72.82 93.55,76.47 91.33,76.47
M1_FW
  Top 0.406: R11.2 JP1.8
M1_FW1
  Top 0.406: R9.2 JP4.8
M1_FW2
  Top 0.406: R23.2 JP7.8
M1_FW3
  Top 0.406: R33.2 JP10.8
M1_FW4
  Top 0.406: R43.2 JP13.8
M1_FW5
  Top 0.406: R53.2 JP16.8
M1_FW6
  Top 0.406: R63.2 JP19.8
M1_FW7
  Top 0.406: R73.2 JP22.8
M1_PWM
  Top 0.406: R12.2 9.05,4.6 7.46,3.02 JP1.7
M1_PWM1
  Top 0.406: R14.2 34.05,4.6 32.46,3.02 JP4.7
M1_PWM2
  Top 0.406: R24.2 59.05,4.6 57.46,3.02 JP7.7
M1_PWM3
  Top 0.406: R34.2 84.05,4.6 82.46,3.02 JP10.7
M1_PWM4
  Top 0.406: R44.2 9.05,47.6 7.46,46.02 JP13.7
M1_PWM5
  Top 0.406: R54.2 34.05,47.6 32.46,46.02 JP16.7
M1_PWM6
  Top 0.406: R64.2 59.05,47.6 57.46,46.02 JP19.7
M1_PWM7
  Top 0.406: R74.2 84.05,47.6 82.46,46.02 JP22.7
M1_RW
  Top 0.406: R13.1 13.18,4.76 10.79,2.38 JP1.6
M1_RW1
  Top 0.406: R15.1 38.18,4.76 35.8,2.38 JP4.6
M1_RW2
  Top 0.406: R25.1 63.18,4.76 60.8,2.38 JP7.6
M1_RW3
  Top 0.406: R35.1 88.18,4.76 85.8,2.38 JP10.6
M1_RW4
  Top 0.406: R45.1 13.18,47.76 10.79,45.38 JP13.6
M1_RW5
  Top 0.406: R55.1 38.18,47.76 35.8,45.38 JP16.6
M1_RW6
  Top 0.406: R65.1 63.18,47.76 60.8,45.38 JP19.6
M1_RW7
  Top 0.406: R75.1 88.18,47.76 85.8,45.38 JP22.6
M2_FW
  Bottom 0.406: JP1.3 19.21,3.97 R6.2
M2_FW1
  Bottom 0.406: JP4.3 44.21,3.97 R18.2
M2_FW2
  Bottom 0.406: JP7.3 69.21,3.97 R28.2
M2_FW3
  Bottom 0.406: JP10.3 94.21,3.97 R38.2
M2_FW4
  Bottom 0.406: JP13.3 19.21,46.97 R48.2
M2_FW5
  Bottom 0.406: JP16.3 44.21,46.97 R58.2
M2_FW6
  Bottom 0.406: JP19.3 69.21,46.97 R68.2
M2_FW7
  Bottom 0.406: JP22.3 94.21,46.97 R78.2
M2_PWM
  Bottom 0.406: R7.2 JP1.4
M2_PWM1
  Bottom 0.406: R19.2 JP4.4
M2_PWM2
  Bottom 0.406: R29.2 JP7.4
M2_PWM3
  Bottom 0.406: R39.2 JP10.4
M2_PWM4
  Bottom 0.406: R49.2 JP13.4
M2_PWM5
  Bottom 0.406: R59.2 JP16.4
M2_PWM6
  Bottom 0.406: R69.2 JP19.4
M2_PWM7
  Bottom 0.406: R79.2 JP22.4
M2_RW
  Bottom 0.406: R8.1 10.95,3.97 JP1.5
M2_RW1
  Bottom 0.406: R20.1 35.95,3.97 JP4.5
M2_RW2
  Bottom 0.406: R30.1 60.95,3.97 JP7.5
M2_RW3
  Bottom 0.406: R40.1 85.95,3.97 JP10.5
M2_RW4
  Bottom 0.406: R50.1 10.95,46.97 JP13.5
M2_RW5
  Bottom 0.406: R60.1 35.95,46.97 JP16.5
M2_RW6
  Bottom 0.406: R70.1 60.95,46.97 JP19.5
M2_RW7
  Bottom 0.406: R80.1 85.95,46.97 JP22.5
N$1
  Bottom 0.406: IC2.P5 16.51,12 16.51,9.53 R6.1
N$2
  Bottom 0.406: IC2.P6 15.56,11.95 15.56,8.41 R5.1
N$3
  Top 0.406: IC1.P5 10.5,11.13 8.26,8.89 6.99,8.89 R11.1
N$4
  Bottom 0.406: IC2.P10 11.43,11.95 11.43,8.41 R3.1
N$5
  Top 0.406: IC3.P5 35.5,11.13 33.26,8.89 31.98,8.89 R9.1
N$6
  Bottom 0.406: IC2.P8 13.49,8.41 R7.1
N$7
  Top 0.406: IC1.P6 11.43,11.94 11.43,10.64 8.73,7.94 8.1,7.94 R10.1
N$8
  Top 0.406: IC1.P10 15.56,11.95 15.56,10.64 12.86,7.94 12.22,7.94 R4.1
N$9
  Top 0.406: IC3.P6 36.43,11.94 36.43,10.64 33.73,7.94 33.1,7.94 R2.1
N$10
  Top 0.406: IC1.P8 13.49,10.79 10.64,7.94 9.68,7.94 9.05,7.3 R12.1
N$11
  Top 0.406: IC1.P11 16.51,10.64 13.18,7.3 R13.2
N$12  (via drill 0.5)
  Top 0.813: IC1.P1 6.25,12.01 5.08,13.18 v5.08,15.88 | v5.08,19.37 v5.08,20.32 5.08,21.91 7.46,24.29 9.21,24.29 IC1.S2
  Top 1.016: IC1.P30 6.5,36.68 X1.1
  Top 1.778: JP3.1 8.89,40.64 X1.1
  Bottom 0.813: v5.08,14.92 v5.08,15.88 v5.08,20.32
  pour Top (isolate 0.178, rank 3, no thermals): 11.56,30.77 11.56,21.73 6.33,21.73 6.33,30.77
N$13
  Top 0.813: IC1.P21 15.5,32.12 15.4,32.23
  Top 1.016: 15.4,32.23 15.4,32.86 X1.2
  Top 1.778: JP3.2 12.06,38.73 X1.2
  pour Top (isolate 0.178, rank 3, no thermals): 15.38,30.77 15.38,21.73 20.3,21.73 20.3,11.41 20.61,11.41 20.61,30.77
N$14
  Bottom 0.406: IC2.P11 10.48,12 10.48,7.3 R8.2
N$15
  Top 0.406: IC3.P10 40.56,11.95 40.56,10.64 37.86,7.94 37.22,7.94 R1.1
N$16
  Top 0.406: IC3.P8 38.49,10.79 35.64,7.94 34.68,7.94 34.05,7.3 R14.1
N$17
  Top 1.778: JP3.3 14.61,38.73 X1.3
  Bottom 0.813: IC2.P21 11.49,32.13 11.59,32.23
  Bottom 1.016: 11.59,32.23 11.59,33.18 X1.3
  pour Bottom (isolate 0.178, rank 3, no thermals): 11.56,30.77 11.56,21.73 6.64,21.73 6.64,11.41 6.33,11.41 6.33,30.77
N$18
  Top 0.406: IC3.P11 41.51,10.64 38.18,7.3 R15.2
N$19
  Top 1.778: JP3.4 17.78,40.64 X1.4
  Bottom 1.016: IC2.P30 20.49,37 X1.4
  pour Bottom (isolate 0.178, rank 3, no thermals): 15.38,30.77 15.38,21.73 20.3,21.73 20.3,11.41 20.61,11.41 20.61,30.77
N$20  (via drill 0.5)
  Top 0.813: IC3.P1 31.25,12.01 30.08,13.18 v30.08,15.88 | v30.08,19.37 v30.08,20.32 30.08,21.91 32.46,24.29 34.21,24.29 IC3.S2
  Top 1.016: IC3.P30 31.5,36.68 X2.1
  Top 1.778: JP6.1 33.89,40.64 X2.1
  Bottom 0.813: v30.08,14.92 v30.08,15.88 v30.08,20.32
  pour Top (isolate 0.178, rank 3, no thermals): 36.56,30.77 36.56,21.73 31.33,21.73 31.33,30.77
N$21
  Top 0.813: IC3.P21 40.5,32.12 40.4,32.23
  Top 1.016: 40.4,32.23 40.4,32.86 X2.2
  Top 1.778: JP6.2 37.06,38.73 X2.2
  pour Top (isolate 0.178, rank 3, no thermals): 40.38,30.77 40.38,21.73 45.3,21.73 45.3,11.41 45.61,11.41 45.61,30.77
N$22
  Bottom 0.406: IC4.P5 41.51,12 41.51,9.53 R18.1
N$23
  Bottom 0.406: IC4.P6 40.56,11.95 40.56,8.41 R17.1
N$24
  Bottom 0.406: IC4.P10 36.43,11.95 36.43,8.41 R16.1
N$25
  Bottom 0.406: IC4.P8 38.49,8.41 R19.1
N$26
  Bottom 0.406: IC4.P11 35.48,12 35.48,7.3 R20.2
N$27
  Top 1.778: JP6.3 39.6,38.73 X2.3
  Bottom 0.813: IC4.P21 36.49,32.13 36.59,32.23
  Bottom 1.016: 36.59,32.23 36.59,33.18 X2.3
  pour Bottom (isolate 0.178, rank 3, no thermals): 36.56,30.77 36.56,21.73 31.64,21.73 31.64,11.41 31.33,11.41 31.33,30.77
N$28
  Top 1.778: JP6.4 42.78,40.64 X2.4
  Bottom 1.016: IC4.P30 45.49,37 X2.4
  pour Bottom (isolate 0.178, rank 3, no thermals): 40.38,30.77 40.38,21.73 45.3,21.73 45.3,11.41 45.61,11.41 45.61,30.77
N$29
  Top 0.406: IC5.P5 60.5,11.13 58.26,8.89 56.98,8.89 R23.1
N$30
  Top 0.406: IC5.P6 61.43,11.94 61.43,10.64 58.73,7.94 58.1,7.94 R22.1
N$31
  Top 0.406: IC5.P10 65.56,11.95 65.56,10.64 62.86,7.94 62.22,7.94 R21.1
N$32
  Top 0.406: IC5.P8 63.49,10.79 60.64,7.94 59.68,7.94 59.05,7.3 R24.1
N$33
  Top 0.406: IC5.P11 66.51,10.64 63.18,7.3 R25.2
N$34  (via drill 0.5)
  Top 0.813: IC5.P1 56.24,12.01 55.08,13.18 v55.08,15.88 | v55.08,19.37 v55.08,20.32 55.08,21.91 57.46,24.29 59.21,24.29 IC5.S2
  Top 1.016: IC5.P30 56.5,36.68 X3.1
  Top 1.778: JP9.1 58.89,40.64 X3.1
  Bottom 0.813: v55.08,14.92 v55.08,15.88 v55.08,20.32
  pour Top (isolate 0.178, rank 3, no thermals): 61.56,30.77 61.56,21.73 56.33,21.73 56.33,30.77
N$35
  Top 0.813: IC5.P21 65.5,32.12 65.4,32.23
  Top 1.016: 65.4,32.23 65.4,32.86 X3.2
  Top 1.778: JP9.2 62.06,38.73 X3.2
  pour Top (isolate 0.178, rank 3, no thermals): 65.38,30.77 65.38,21.73 70.3,21.73 70.3,11.41 70.61,11.41 70.61,30.77
N$36
  Bottom 0.406: IC6.P5 66.51,12 66.51,9.53 R28.1
N$37
  Bottom 0.406: IC6.P6 65.56,11.95 65.56,8.41 R27.1
N$38
  Bottom 0.406: IC6.P10 61.43,11.95 61.43,8.41 R26.1
N$39
  Bottom 0.406: IC6.P8 63.49,8.41 R29.1
N$40
  Bottom 0.406: IC6.P11 60.48,12 60.48,7.3 R30.2
N$41
  Top 1.778: JP9.3 64.61,38.73 X3.3
  Bottom 0.813: IC6.P21 61.49,32.13 61.59,32.23
  Bottom 1.016: 61.59,32.23 61.59,33.18 X3.3
  pour Bottom (isolate 0.178, rank 3, no thermals): 61.56,30.77 61.56,21.73 56.64,21.73 56.64,11.41 56.33,11.41 56.33,30.77
N$42
  Top 1.778: JP9.4 67.78,40.64 X3.4
  Bottom 1.016: IC6.P30 70.49,37 X3.4
  pour Bottom (isolate 0.178, rank 3, no thermals): 65.38,30.77 65.38,21.73 70.3,21.73 70.3,11.41 70.61,11.41 70.61,30.77
N$43
  Top 0.406: IC7.P5 85.5,11.13 83.25,8.89 81.98,8.89 R33.1
N$44
  Top 0.406: IC7.P6 86.43,11.94 86.43,10.64 83.73,7.94 83.1,7.94 R32.1
N$45
  Top 0.406: IC7.P10 90.56,11.95 90.56,10.64 87.86,7.94 87.22,7.94 R31.1
N$46
  Top 0.406: IC7.P8 88.49,10.79 85.64,7.94 84.68,7.94 84.05,7.3 R34.1
N$47
  Top 0.406: IC7.P11 91.51,10.64 88.18,7.3 R35.2
N$48  (via drill 0.5)
  Top 0.813: IC7.P1 81.25,12.01 80.08,13.18 v80.08,15.88 | v80.08,19.37 v80.08,20.32 80.08,21.91 82.46,24.29 84.21,24.29 IC7.S2
  Top 1.016: IC7.P30 81.5,36.68 X4.1
  Top 1.778: JP12.1 83.89,40.64 X4.1
  Bottom 0.813: v80.08,14.92 v80.08,15.88 v80.08,20.32
  pour Top (isolate 0.178, rank 3, no thermals): 86.56,30.77 86.56,21.73 81.33,21.73 81.33,30.77
N$49
  Top 0.813: IC7.P21 90.5,32.12 90.4,32.23
  Top 1.016: 90.4,32.23 90.4,32.86 X4.2
  Top 1.778: JP12.2 87.06,38.73 X4.2
  pour Top (isolate 0.178, rank 3, no thermals): 90.38,30.77 90.38,21.73 95.3,21.73 95.3,11.41 95.61,11.41 95.61,30.77
N$50
  Bottom 0.406: IC8.P5 91.51,12 91.51,9.53 R38.1
N$51
  Bottom 0.406: IC8.P6 90.56,11.95 90.56,8.41 R37.1
N$52
  Bottom 0.406: IC8.P10 86.43,11.95 86.43,8.41 R36.1
N$53
  Bottom 0.406: IC8.P8 88.49,8.41 R39.1
N$54
  Bottom 0.406: IC8.P11 85.48,12 85.48,7.3 R40.2
N$55
  Top 1.778: JP12.3 89.61,38.73 X4.3
  Bottom 0.813: IC8.P21 86.49,32.13 86.59,32.23
  Bottom 1.016: 86.59,32.23 86.59,33.18 X4.3
  pour Bottom (isolate 0.178, rank 3, no thermals): 86.56,30.77 86.56,21.73 81.64,21.73 81.64,11.41 81.33,11.41 81.33,30.77
N$56
  Top 1.778: JP12.4 92.78,40.64 X4.4
  Bottom 1.016: IC8.P30 95.49,37 X4.4
  pour Bottom (isolate 0.178, rank 3, no thermals): 90.38,30.77 90.38,21.73 95.3,21.73 95.3,11.41 95.61,11.41 95.61,30.77
N$57
  Top 0.406: IC9.P5 10.5,54.13 8.26,51.89 6.99,51.89 R43.1
N$58
  Top 0.406: IC9.P6 11.43,54.94 11.43,53.64 8.73,50.94 8.1,50.94 R42.1
N$59
  Top 0.406: IC9.P10 15.56,54.95 15.56,53.64 12.86,50.94 12.22,50.94 R41.1
N$60
  Top 0.406: IC9.P8 13.49,53.8 10.64,50.94 9.68,50.94 9.05,50.3 R44.1
N$61
  Top 0.406: IC9.P11 16.51,53.64 13.18,50.3 R45.2
N$62  (via drill 0.5)
  Top 0.813: IC9.P1 6.25,55.01 5.08,56.18 v5.08,58.88 | v5.08,62.37 v5.08,63.32 5.08,64.91 7.46,67.29 9.21,67.29 IC9.S2
  Top 1.016: IC9.P30 6.5,79.68 X5.1
  Top 1.778: JP15.1 8.89,83.64 X5.1
  Bottom 0.813: v5.08,57.92 v5.08,58.88 v5.08,63.32
  pour Top (isolate 0.178, rank 3, no thermals): 11.56,73.77 11.56,64.72 6.33,64.72 6.33,73.77
N$63
  Top 0.813: IC9.P21 15.5,75.12 15.4,75.23
  Top 1.016: 15.4,75.23 15.4,75.86 X5.2
  Top 1.778: JP15.2 12.06,81.73 X5.2
  pour Top (isolate 0.178, rank 3, no thermals): 15.38,73.77 15.38,64.72 20.3,64.72 20.3,54.41 20.61,54.41 20.61,73.77
N$64
  Bottom 0.406: IC10.P5 16.51,55 16.51,52.52 R48.1
N$65
  Bottom 0.406: IC10.P6 15.56,54.95 15.56,51.41 R47.1
N$66
  Bottom 0.406: IC10.P10 11.43,54.95 11.43,51.41 R46.1
N$67
  Bottom 0.406: IC10.P8 13.49,51.41 R49.1
N$68
  Bottom 0.406: IC10.P11 10.48,55 10.48,50.3 R50.2
N$69
  Top 1.778: JP15.3 14.61,81.73 X5.3
  Bottom 0.813: IC10.P21 11.49,75.13 11.59,75.23
  Bottom 1.016: 11.59,75.23 11.59,76.18 X5.3
  pour Bottom (isolate 0.178, rank 3, no thermals): 11.56,73.77 11.56,64.72 6.64,64.72 6.64,54.41 6.33,54.41 6.33,73.77
N$70
  Top 1.778: JP15.4 17.78,83.64 X5.4
  Bottom 1.016: IC10.P30 20.49,80 X5.4
  pour Bottom (isolate 0.178, rank 3, no thermals): 15.38,73.77 15.38,64.72 20.3,64.72 20.3,54.41 20.61,54.41 20.61,73.77
N$71
  Top 0.406: IC11.P5 35.5,54.13 33.26,51.89 31.98,51.89 R53.1
N$72
  Top 0.406: IC11.P6 36.43,54.94 36.43,53.64 33.73,50.94 33.1,50.94 R52.1
N$73
  Top 0.406: IC11.P10 40.56,54.95 40.56,53.64 37.86,50.94 37.22,50.94 R51.1
N$74
  Top 0.406: IC11.P8 38.49,53.8 35.64,50.94 34.68,50.94 34.05,50.3 R54.1
N$75
  Top 0.406: IC11.P11 41.51,53.64 38.18,50.3 R55.2
N$76  (via drill 0.5)
  Top 0.813: IC11.P1 31.25,55.01 30.08,56.18 v30.08,58.88 | v30.08,62.37 v30.08,63.32 30.08,64.91 32.46,67.29 34.21,67.29 IC11.S2
  Top 1.016: IC11.P30 31.5,79.68 X6.1
  Top 1.778: JP18.1 33.89,83.64 X6.1
  Bottom 0.813: v30.08,57.92 v30.08,58.88 v30.08,63.32
  pour Top (isolate 0.178, rank 3, no thermals): 36.56,73.77 36.56,64.72 31.33,64.72 31.33,73.77
N$77
  Top 0.813: IC11.P21 40.5,75.12 40.4,75.23
  Top 1.016: 40.4,75.23 40.4,75.86 X6.2
  Top 1.778: JP18.2 37.06,81.73 X6.2
  pour Top (isolate 0.178, rank 3, no thermals): 40.38,73.77 40.38,64.72 45.3,64.72 45.3,54.41 45.61,54.41 45.61,73.77
N$78
  Bottom 0.406: IC12.P5 41.51,55 41.51,52.52 R58.1
N$79
  Bottom 0.406: IC12.P6 40.56,54.95 40.56,51.41 R57.1
N$80
  Bottom 0.406: IC12.P10 36.43,54.95 36.43,51.41 R56.1
N$81
  Bottom 0.406: IC12.P8 38.49,51.41 R59.1
N$82
  Bottom 0.406: IC12.P11 35.48,55 35.48,50.3 R60.2
N$83
  Top 1.778: JP18.3 39.6,81.73 X6.3
  Bottom 0.813: IC12.P21 36.49,75.13 36.59,75.23
  Bottom 1.016: 36.59,75.23 36.59,76.18 X6.3
  pour Bottom (isolate 0.178, rank 3, no thermals): 36.56,73.77 36.56,64.72 31.64,64.72 31.64,54.41 31.33,54.41 31.33,73.77
N$84
  Top 1.778: JP18.4 42.78,83.64 X6.4
  Bottom 1.016: IC12.P30 45.49,80 X6.4
  pour Bottom (isolate 0.178, rank 3, no thermals): 40.38,73.77 40.38,64.72 45.3,64.72 45.3,54.41 45.61,54.41 45.61,73.77
N$85
  Top 0.406: IC13.P5 60.5,54.13 58.26,51.89 56.98,51.89 R63.1
N$86
  Top 0.406: IC13.P6 61.43,54.94 61.43,53.64 58.73,50.94 58.1,50.94 R62.1
N$87
  Top 0.406: IC13.P10 65.56,54.95 65.56,53.64 62.86,50.94 62.22,50.94 R61.1
N$88
  Top 0.406: IC13.P8 63.49,53.8 60.64,50.94 59.68,50.94 59.05,50.3 R64.1
N$89
  Top 0.406: IC13.P11 66.51,53.64 63.18,50.3 R65.2
N$90  (via drill 0.5)
  Top 0.813: IC13.P1 56.24,55.01 55.08,56.18 v55.08,58.88 | v55.08,62.37 v55.08,63.32 55.08,64.91 57.46,67.29 59.21,67.29 IC13.S2
  Top 1.016: IC13.P30 56.5,79.68 X7.1
  Top 1.778: JP21.1 58.89,83.64 X7.1
  Bottom 0.813: v55.08,57.92 v55.08,58.88 v55.08,63.32
  pour Top (isolate 0.178, rank 3, no thermals): 61.56,73.77 61.56,64.72 56.33,64.72 56.33,73.77
N$91
  Top 0.813: IC13.P21 65.5,75.12 65.4,75.23
  Top 1.016: 65.4,75.23 65.4,75.86 X7.2
  Top 1.778: JP21.2 62.06,81.73 X7.2
  pour Top (isolate 0.178, rank 3, no thermals): 65.38,73.77 65.38,64.72 70.3,64.72 70.3,54.41 70.61,54.41 70.61,73.77
N$92
  Bottom 0.406: IC14.P5 66.51,55 66.51,52.52 R68.1
N$93
  Bottom 0.406: IC14.P6 65.56,54.95 65.56,51.41 R67.1
N$94
  Bottom 0.406: IC14.P10 61.43,54.95 61.43,51.41 R66.1
N$95
  Bottom 0.406: IC14.P8 63.49,51.41 R69.1
N$96
  Bottom 0.406: IC14.P11 60.48,55 60.48,50.3 R70.2
N$97
  Top 1.778: JP21.3 64.61,81.73 X7.3
  Bottom 0.813: IC14.P21 61.49,75.13 61.59,75.23
  Bottom 1.016: 61.59,75.23 61.59,76.18 X7.3
  pour Bottom (isolate 0.178, rank 3, no thermals): 61.56,73.77 61.56,64.72 56.64,64.72 56.64,54.41 56.33,54.41 56.33,73.77
N$98
  Top 1.778: JP21.4 67.78,83.64 X7.4
  Bottom 1.016: IC14.P30 70.49,80 X7.4
  pour Bottom (isolate 0.178, rank 3, no thermals): 65.38,73.77 65.38,64.72 70.3,64.72 70.3,54.41 70.61,54.41 70.61,73.77
N$99
  Top 0.406: IC15.P5 85.5,54.13 83.25,51.89 81.98,51.89 R73.1
N$100
  Top 0.406: IC15.P6 86.43,54.94 86.43,53.64 83.73,50.94 83.1,50.94 R72.1
N$101
  Top 0.406: IC15.P10 90.56,54.95 90.56,53.64 87.86,50.94 87.22,50.94 R71.1
N$102
  Top 0.406: IC15.P8 88.49,53.8 85.64,50.94 84.68,50.94 84.05,50.3 R74.1
N$103
  Top 0.406: IC15.P11 91.51,53.64 88.18,50.3 R75.2
N$104  (via drill 0.5)
  Top 0.813: IC15.P1 81.25,55.01 80.08,56.18 v80.08,58.88 | v80.08,62.37 v80.08,63.32 80.08,64.91 82.46,67.29 84.21,67.29 IC15.S2
  Top 1.016: IC15.P30 81.5,79.68 X8.1
  Top 1.778: JP24.1 83.89,83.64 X8.1
  Bottom 0.813: v80.08,57.92 v80.08,58.88 v80.08,63.32
  pour Top (isolate 0.178, rank 3, no thermals): 86.56,73.77 86.56,64.72 81.33,64.72 81.33,73.77
N$105
  Top 0.813: IC15.P21 90.5,75.12 90.4,75.23
  Top 1.016: 90.4,75.23 90.4,75.86 X8.2
  Top 1.778: JP24.2 87.06,81.73 X8.2
  pour Top (isolate 0.178, rank 3, no thermals): 90.38,73.77 90.38,64.72 95.3,64.72 95.3,54.41 95.61,54.41 95.61,73.77
N$106
  Bottom 0.406: IC16.P5 91.51,55 91.51,52.52 R78.1
N$107
  Bottom 0.406: IC16.P6 90.56,54.95 90.56,51.41 R77.1
N$108
  Bottom 0.406: IC16.P10 86.43,54.95 86.43,51.41 R76.1
N$109
  Bottom 0.406: IC16.P8 88.49,51.41 R79.1
N$110
  Bottom 0.406: IC16.P11 85.48,55 85.48,50.3 R80.2
N$111
  Top 1.778: JP24.3 89.61,81.73 X8.3
  Bottom 0.813: IC16.P21 86.49,75.13 86.59,75.23
  Bottom 1.016: 86.59,75.23 86.59,76.18 X8.3
  pour Bottom (isolate 0.178, rank 3, no thermals): 86.56,73.77 86.56,64.72 81.64,64.72 81.64,54.41 81.33,54.41 81.33,73.77
N$112
  Top 1.778: JP24.4 92.78,83.64 X8.4
  Bottom 1.016: IC16.P30 95.49,80 X8.4
  pour Bottom (isolate 0.178, rank 3, no thermals): 90.38,73.77 90.38,64.72 95.3,64.72 95.3,54.41 95.61,54.41 95.61,73.77

## Text on the board
tPlace: TOP | TOP | TOP | TOP | TOP | TOP | TOP | TOP
bPlace: BOTTOM | BOTTOM | BOTTOM | BOTTOM | BOTTOM | BOTTOM | BOTTOM | BOTTOM